# Altium PCB vt18_cpu_board.PcbDoc (part 5 of 7)
Units mil, origin at the board's own origin, x right, y up, seen from the top; angles counter-clockwise.
Board outline 2283.46 x 2244.09 mil, 8 copper layers (Top Layer, GND1, Signal Layer 1, POWER1, POWER2, Signal Layer 2, GND2, Bottom Layer), stack 66.304 mil thick; 339 components, 286 nets, 1965 pads, 1047 vias.
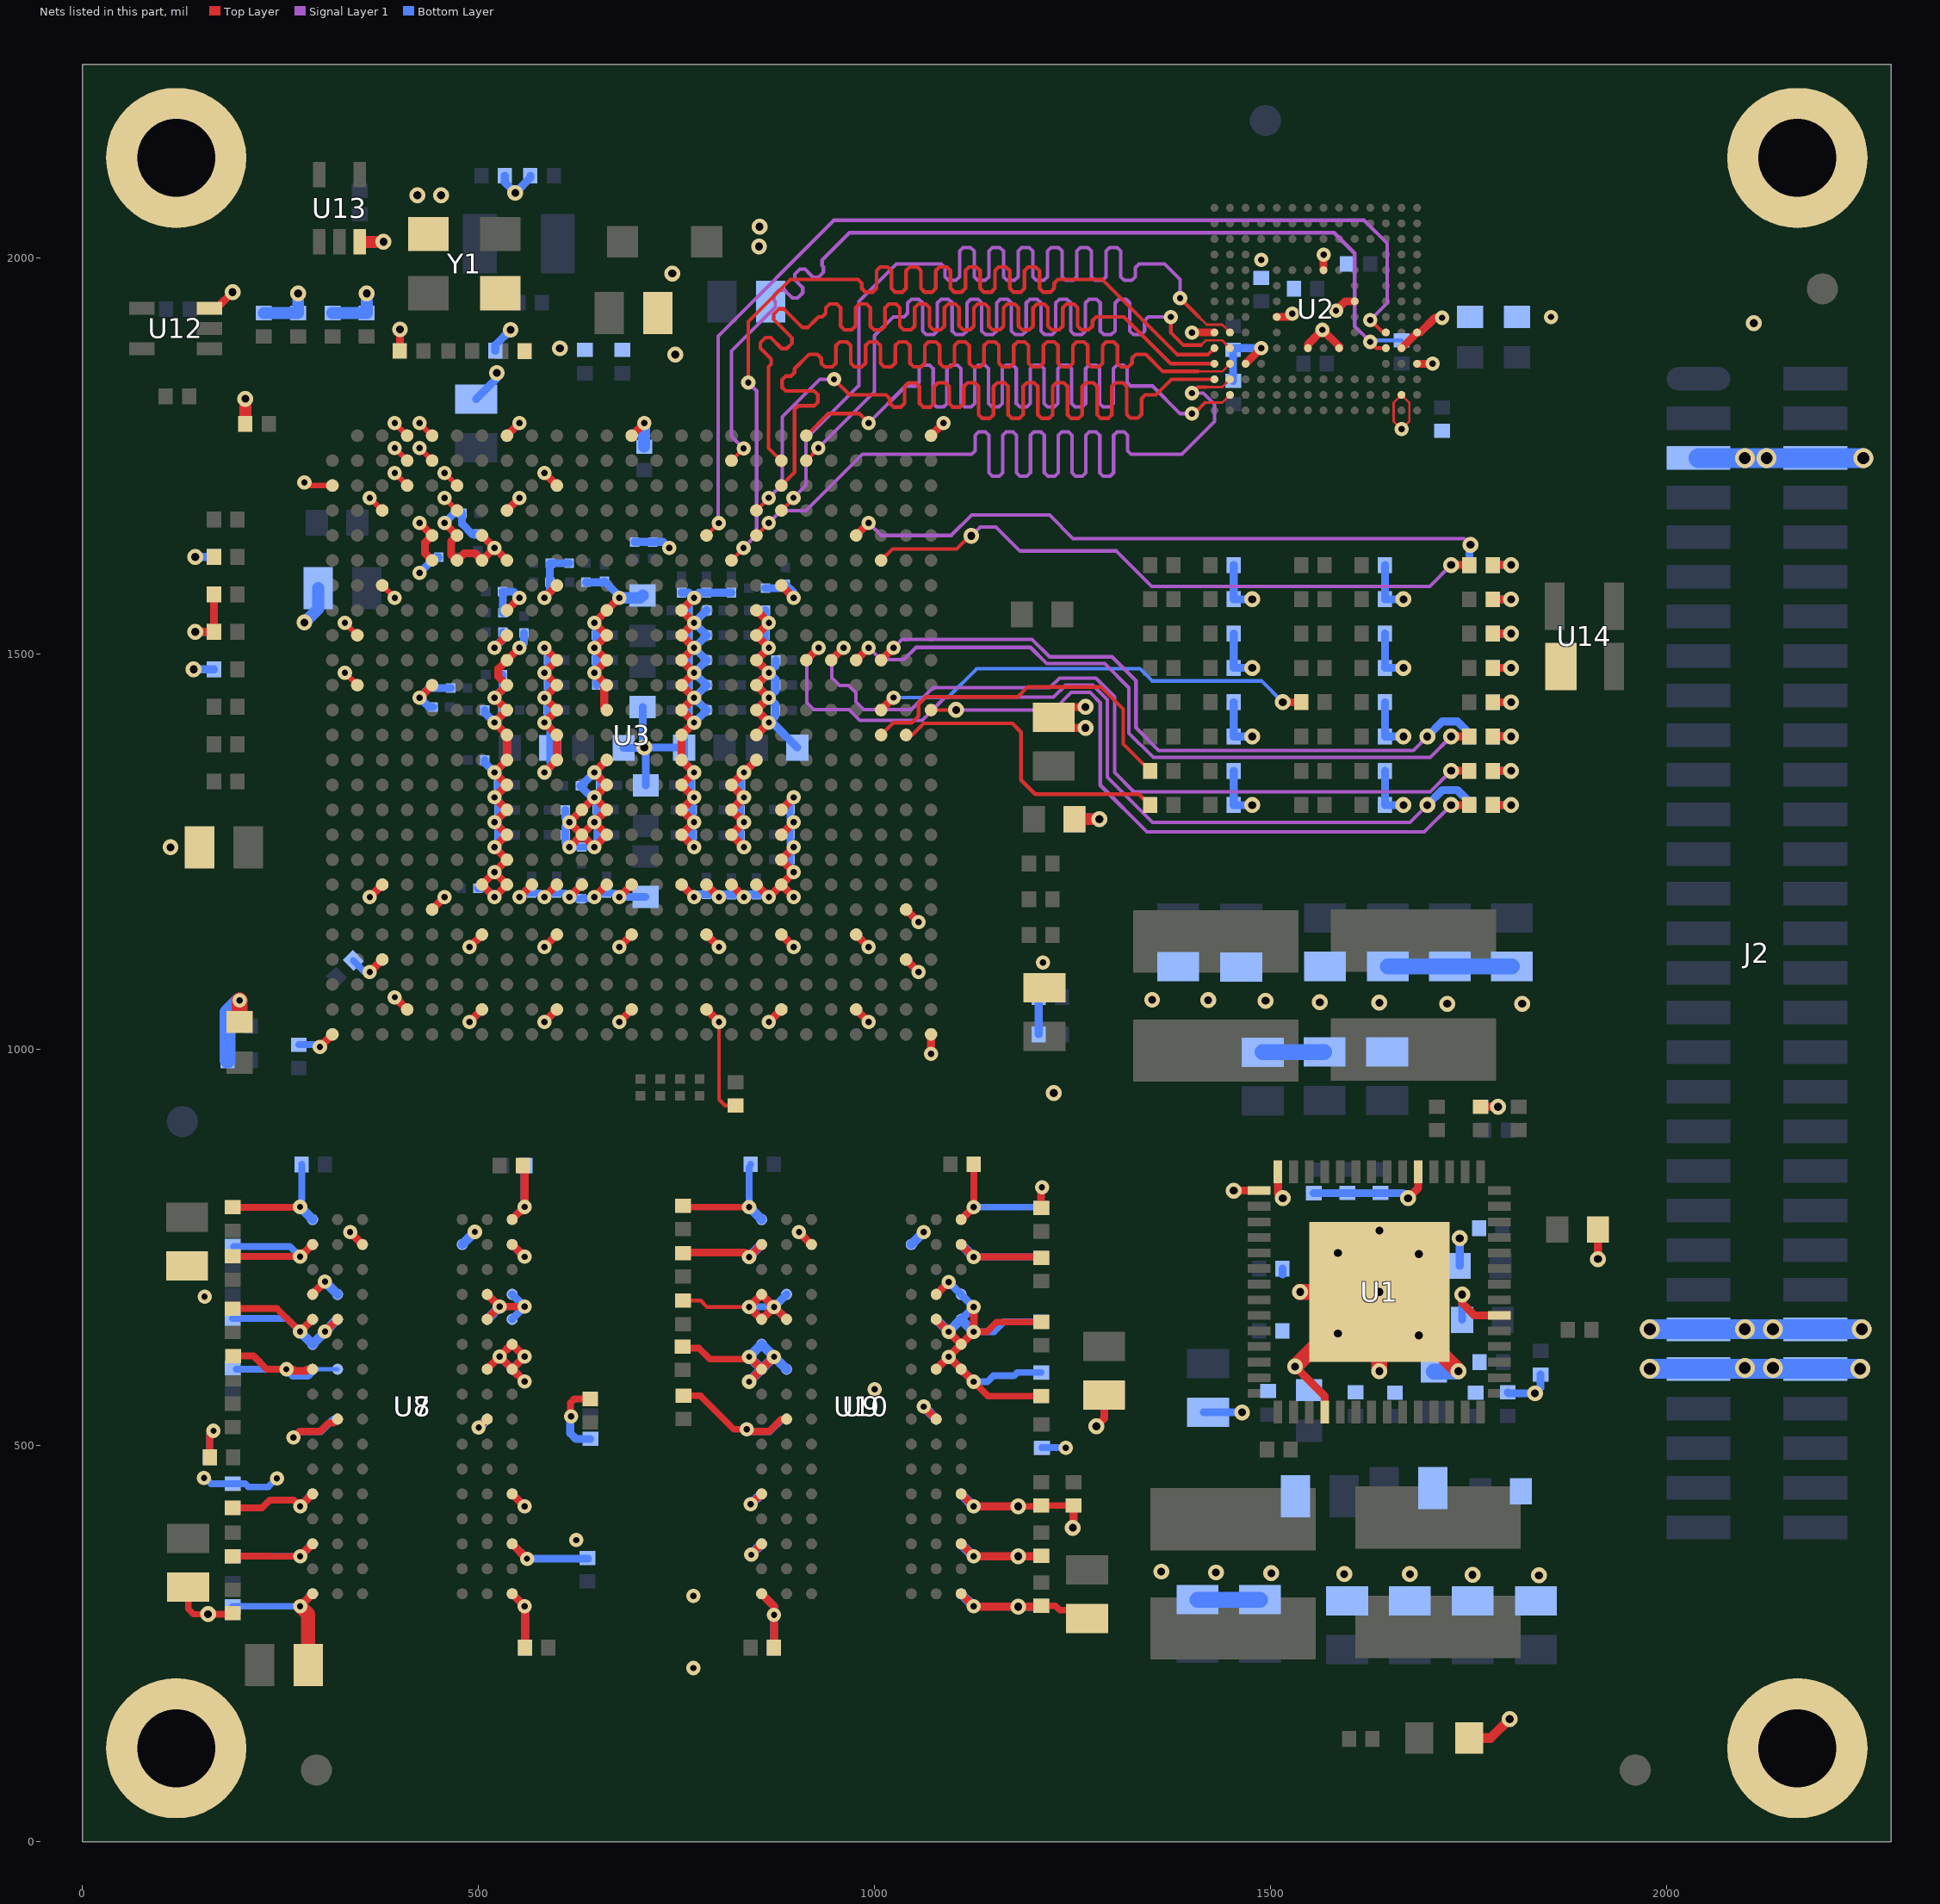
[diagram p11: the nets of this part, all layers, seen from the top]

## Via types
v1: diameter 18, hole 8, Top Layer to Bottom Layer, tented both sides, 718 vias
v2: diameter 20, hole 10, Top Layer to Bottom Layer, tented both sides, 300 vias
v3: diameter 25, hole 15, Top Layer to Bottom Layer, tented both sides, 27 vias
v4: diameter 17.99, hole 7.99, Top Layer to Bottom Layer, tented both sides, 2 vias

## Nets (pads, with @x,y where several pads share a name; then routed paths per layer and width w, separated by ;. In a path a pad name is that pad's centre, name@x,y a point inside that pad or via, vN(x,y) a via of type N, cw(c..) or ccw(c..) an arc to the next point about the centre after c; other vN are vias at no path point) (continued)
EIM-DA13: R97.1 U3.M23 | length 569.7
  Top Layer w10: U3.M23@1008.34,1428.84 v1(1024.08,1444.59) ; v2(1515.51,1438.76) R97.1@1538.86,1438.76
  Bottom Layer w4.7: v1(1024.08,1444.59) 1092.59,1444.59 1129.13,1481.13 1335.12,1481.13 1350.52,1465.73 1488.54,1465.73 v2(1515.51,1438.76)
EIM-DA14: R99.1 U3.N23 | length 443
  Top Layer w4.7: U3.N23@1008.34,1397.34 1023.85,1412.85 1047,1412.85 1055.59,1421.44 1055.59,1436.18 1064.76,1445.35 1180.63,1445.35 1193.41,1458.13 1285.87,1458.13 1314,1430 1314,1386.02 R99.1@1347.87,1352.16
EIM-DA15: R101.1 U3.N24 | length 392.2
  Top Layer w4.7: U3.N24@1039.84,1397.34 1047.49,1397.34 1062.15,1412 1174,1412 1185,1401 1185,1340.6 1202.88,1322.72 1334,1322.72 R101.1@1347.87,1308.85
EIM-EB0: R114.1 U3.K21 | length 1038.2
  Top Layer w10: U3.K21@945.35,1491.83 v1(961.09,1507.58) ; v2(1728,1352.13) R114.1@1751.11,1352.13
  Signal Layer 1 w4.5: v1(961.09,1507.58) 945.84,1492.33 945.84,1469.76 955.76,1459.84 967.41,1459.84 976.34,1450.91 976.34,1439.27 986.27,1429.34 1046.34,1429.34 1074,1457 1221.33,1457 1233.43,1469.1 1279.53,1469.1 1303.1,1445.53 1303.1,1349.9 1327.4,1325.6 1701.47,1325.6 v2(1728,1352.13)
EIM-EB1: R115.1 U3.K23 | length 871.7
  Top Layer w10: U3.K23@1008.34,1491.83 v1(1024.08,1507.58)
  Signal Layer 1 w4.5: v1(1024.08,1507.58) 1034.5,1518 1198.96,1518 1220.96,1496 1300,1496 1330.1,1465.9 1330.1,1406.49 1358.68,1377.91 1680.47,1377.91 v2(1698,1395.43)
  Bottom Layer w10: v2(1698,1395.43) 1716.97,1414.43 1735.87,1414.43 1751.11,1399.19 R115.1@1751.11,1395.43
EIM-EB2: R117.1 U3.E22 | length 840.9
  Top Layer w10: U3.E22@976.84,1649.31 v1(992.59,1665.06)
  Signal Layer 1 w4.5: v1(992.59,1665.06) 1008.34,1649.32 1096.83,1649.32 1122.51,1675 1221,1675 1250.62,1645.38 1744.56,1645.38 v2(1752.44,1637.5)
  Bottom Layer w10: R117.1@1751.11,1611.97 1751.11,1636.18 v2(1752.44,1637.5)
EIM-EB3: R118.1 U3.F23 | length 804.3
  Top Layer w4.7: U3.F23@1008.34,1617.81 1022.69,1632.16 1103.74,1632.16 1120.39,1648.81 v2(1122.19,1648.81) v2@1124,1648.81
  Top Layer w10: v2(1728,1611.97) R118.1@1751.11,1611.97
  Signal Layer 1 w4.5: v2(1122.19,1648.81) 1133.38,1660 1153.27,1660 1183.56,1629.7 1305.3,1629.7 1350.06,1584.94 1700.97,1584.94 v2(1728,1611.97)
EIM-LBA: R113.1 U3.K22 | length 895.7
  Top Layer w10: U3.K22@976.84,1491.83 v1(992.59,1507.58) ; v2(1728,1395.43) R113.1@1751.11,1395.43
  Signal Layer 1 w4.5: v1(992.59,1507.58) 1007.84,1492.33 1036.71,1492.33 1052.38,1508 1196.94,1508 1217.44,1487.5 1290.5,1487.5 1321.1,1456.9 1321.1,1399.74 1351.93,1368.91 1701.47,1368.91 v2(1728,1395.43)
EIM-RW: R116.1 U3.K20 | length 1118.2
  Top Layer w10: U3.K20@913.85,1491.83 v1(929.6,1507.58)
  Signal Layer 1 w4.5: v1(929.6,1507.58) 914.35,1492.33 914.35,1438.27 923.28,1429.34 968,1429.34 981.34,1416 1060,1416 1089.25,1445.25 1226.13,1445.25 1240.98,1460.1 1275.8,1460.1 1294.1,1441.8 1294.1,1343.9 1351,1287 1676.18,1287 v2(1698,1308.82)
  Bottom Layer w10: v2(1698,1308.82) 1716.97,1327.82 1735.87,1327.82 1751.11,1312.58 R116.1@1751.11,1308.82
EIM-WAIT: R112.1 U3.M25 | length 836.8
  Top Layer w4.7: U3.M25@1071.33,1428.84 1102.84,1428.84 v2(1103,1429)
  Top Layer w10: v2(1728,1308.82) R112.1@1751.11,1308.82
  Signal Layer 1 w4.5: v2(1103,1429) 1226.35,1429 1248.35,1451 1272.03,1451 1285,1438.03 1285,1334 1344,1275 1694.18,1275 v2(1728,1308.82)
EMMC-CLK: U2.M6 U3.E16 | length 1307.6
  Top Layer w4.7: U3.E16@787.87,1649.31 803.15,1664.59 v1(803.15,1664.83) ; v1(1625.98,1921.26) 1641.73,1905.51 U2.M6@1645.67,1905.51
  Signal Layer 1 w4.5: v1(803.15,1664.83) 802.38,1665.6 802.38,1900.8 948.82,2047.24 1618.11,2047.24 1647.21,2018.15 1647.21,1942.48 v1(1625.98,1921.26)
EMMC-CMD: R9.1 U2.M5 U3.B17 | length 1260.5
  Top Layer w4.7: U3.B17@819.36,1743.8 v1(834.65,1759.09) ; v1(1625.98,1893.7) 1633.86,1885.83 U2.M5@1645.67,1885.83
  Signal Layer 1 w4.5: v1(834.65,1759.09) 819.38,1774.36 819.38,1882.37 862.2,1925.2 874.87,1937.86 874.87,1944.4 873.11,1946.16 873.11,1952.7 879.65,1959.24 886.2,1959.24 891.22,1954.21 896.25,1949.19 902.79,1949.19 909.33,1955.73 909.33,1962.27 904.3,1967.3 899.28,1972.32 899.28,1978.86 905.82,1985.4 912.36,1985.4 917.39,1980.38 922.41,1975.35 928.95,1975.35 935.49,1981.89 935.49,1988.43 933.74,1990.19 933.74,1996.73 937.01,2000 968.5,2031.5 1580.2,2031.5 1606.3,2005.39 1606.3,1913.39 v1(1625.98,1893.7)
  Bottom Layer w4.7: v1(1625.98,1893.7) 1627.95,1895.66 R9.1@1665.35,1895.66
EMMC-DATA0: U2.A3 U3.D18 | length 1307.6
  Top Layer w4.7: U3.D18@850.86,1680.8 866.38,1696.32 v1(866.38,1696.85) ; v1(948.82,1846.46) 968.5,1826.77 996.06,1826.77 1014.53,1826.77 1019.21,1822.1 1019.21,1816.16 1023.88,1811.49 1033.23,1811.49 1037.91,1816.16 1037.91,1826.77 1037.91,1837.38 1042.58,1842.06 1051.93,1842.06 1056.61,1837.38 1056.61,1826.77 1056.61,1816.16 1061.28,1811.49 1070.63,1811.49 1075.31,1816.16 1075.31,1826.77 1075.31,1837.38 1079.98,1842.06 1089.33,1842.06 1094.01,1837.38 1094.01,1826.77 1094.01,1816.16 1098.68,1811.49 1108.03,1811.49 1112.71,1816.16 1112.71,1826.77 1112.71,1837.38 1117.38,1842.06 1126.73,1842.06 1131.41,1837.38 1131.41,1826.77 1131.41,1801.71 1136.08,1797.04 1145.43,1797.04 1150.11,1801.71 1150.11,1826.77 1150.11,1837.38 1154.78,1842.06 1164.13,1842.06 1168.81,1837.38 1168.81,1826.77 1168.81,1801.71 1173.48,1797.04 1182.83,1797.04 1187.51,1801.71 1187.51,1826.77 1187.51,1837.38 1192.18,1842.06 1201.53,1842.06 1206.21,1837.38 1206.21,1826.77 1206.21,1801.71 1210.88,1797.04 1220.23,1797.04 1224.91,1801.71 1224.91,1826.77 1224.91,1837.38 1229.58,1842.06 1238.93,1842.06 1243.61,1837.38 1243.61,1826.77 1243.61,1801.71 1248.28,1797.04 1257.63,1797.04 1262.31,1801.71 1262.31,1826.77 1262.31,1837.38 1266.98,1842.06 1276.33,1842.06 1281.01,1837.38 1281.01,1826.77 1281.01,1801.71 1285.68,1797.04 1295.03,1797.04 1299.71,1801.71 1299.71,1826.77 1299.71,1837.38 1304.38,1842.06 1313.73,1842.06 1318.41,1837.38 1318.41,1826.77 1318.41,1802.1 1323.08,1797.42 1332.43,1797.42 1337.11,1802.1 1337.11,1822.1 1341.78,1826.77 1346.46,1826.77 1355.33,1826.77 1375.02,1846.46 U2.A3@1429.13,1846.46
  Signal Layer 1 w4.5: v1@866.14,1697.09 v1(866.38,1696.85) 883.39,1713.86 883.39,1799.21 930.63,1846.46 v1(948.82,1846.46)
EMMC-DATA1: U2.A4 U3.B19 | length 1341.3
  Top Layer w4.7: U3.B19@882.36,1743.8 881.89,1743.8 866.14,1759.55 866.14,1862.2 869.45,1865.51 869.45,1872.12 855.71,1885.86 855.71,1892.47 862.32,1899.08 868.93,1899.08 882.67,1885.34 889.28,1885.34 895.89,1891.96 895.89,1898.57 872.54,1921.92 872.54,1928.53 879.15,1935.14 885.77,1935.14 909.12,1911.79 915.73,1911.79 925.64,1921.71 929.13,1925.2 933.81,1925.2 938.48,1929.87 938.48,1936.8 943.16,1941.48 952.51,1941.48 957.18,1936.8 957.18,1925.2 957.18,1913.59 961.86,1908.92 971.21,1908.92 975.88,1913.59 975.88,1925.2 975.88,1936.8 980.56,1941.48 989.91,1941.48 994.58,1936.8 994.58,1925.2 994.58,1913.59 999.26,1908.92 1008.61,1908.92 1013.28,1913.59 1013.28,1925.2 1013.28,1936.8 1017.96,1941.48 1027.31,1941.48 1031.98,1936.8 1031.98,1925.2 1031.98,1913.59 1036.66,1908.92 1046.01,1908.92 1050.68,1913.59 1050.68,1925.2 1050.68,1936.8 1055.36,1941.48 1064.71,1941.48 1069.38,1936.8 1069.38,1925.2 1069.38,1913.59 1074.06,1908.92 1083.41,1908.92 1088.08,1913.59 1088.08,1925.2 1088.08,1936.8 1092.76,1941.48 1102.11,1941.48 1106.78,1936.8 1106.78,1925.2 1106.78,1913.59 1111.46,1908.92 1120.81,1908.92 1125.48,1913.59 1125.48,1925.2 1125.48,1936.8 1130.16,1941.48 1139.51,1941.48 1144.18,1936.8 1144.18,1925.2 1144.18,1913.59 1148.86,1908.92 1158.21,1908.92 1162.88,1913.59 1162.88,1925.2 1162.88,1936.8 1167.56,1941.48 1176.91,1941.48 1181.58,1936.8 1181.58,1925.2 1181.58,1913.59 1186.26,1908.92 1195.61,1908.92 1200.28,1913.59 1200.28,1925.2 1200.28,1936.8 1204.96,1941.48 1214.31,1941.48 1218.98,1936.8 1218.98,1925.2 1218.98,1913.59 1223.66,1908.92 1233.01,1908.92 1237.68,1913.59 1237.68,1925.2 1237.68,1936.8 1242.36,1941.48 1251.71,1941.48 1256.38,1936.8 1256.38,1925.2 1256.38,1913.59 1261.06,1908.92 1270.41,1908.92 1275.08,1913.59 1275.08,1920.52 1279.76,1925.2 1303.15,1925.2 1314.96,1925.2 1374.02,1866.14 U2.A4@1429.13,1866.14
EMMC-DATA2: U2.A5 U3.F17 | length 1307.6
  Top Layer w4.7: U3.F17@819.36,1617.81 834.61,1633.06 v1(834.61,1633.56) ; v1(840.57,1842.52) 840.57,1919.31 893.7,1972.44 956.69,1972.44 979.1,1972.44 983.77,1967.77 983.77,1961.28 988.45,1956.6 997.8,1956.6 1002.47,1961.28 1002.47,1972.44 1002.47,1983.61 1007.15,1988.28 1016.5,1988.28 1021.17,1983.61 1021.17,1972.44 1021.17,1961.28 1025.85,1956.6 1035.2,1956.6 1039.87,1961.28 1039.87,1972.44 1039.87,1983.61 1044.55,1988.28 1053.9,1988.28 1058.57,1983.61 1058.57,1972.44 1058.57,1961.28 1063.25,1956.6 1072.6,1956.6 1077.27,1961.28 1077.27,1972.44 1077.27,1983.61 1081.95,1988.28 1091.3,1988.28 1095.97,1983.61 1095.97,1972.44 1095.97,1961.28 1100.65,1956.6 1110,1956.6 1114.67,1961.28 1114.67,1972.44 1114.67,1983.61 1119.35,1988.28 1128.7,1988.28 1133.37,1983.61 1133.37,1972.44 1133.37,1961.28 1138.05,1956.6 1147.4,1956.6 1152.07,1961.28 1152.07,1972.44 1152.07,1983.61 1156.75,1988.28 1166.1,1988.28 1170.77,1983.61 1170.77,1972.44 1170.77,1961.28 1175.45,1956.6 1184.8,1956.6 1189.47,1961.28 1189.47,1972.44 1189.47,1983.61 1194.15,1988.28 1203.5,1988.28 1208.17,1983.61 1208.17,1972.44 1208.17,1961.28 1212.85,1956.6 1222.2,1956.6 1226.87,1961.28 1226.87,1967.77 1231.55,1972.44 1236.22,1972.44 1287.4,1972.44 1382.02,1877.83 1421.13,1877.83 U2.A5@1429.13,1885.83
  Signal Layer 1 w4.5: v1(834.61,1633.56) 850.65,1649.61 851.15,1649.61 851.15,1831.93 v1(840.57,1842.52)
EMMC-DATA3: U2.B2 U3.A20 | length 1307.6
  Top Layer w3: 1417.32,1816.97 1439.02,1816.97 U2.B2@1448.82,1826.77
  Top Layer w4.7: U3.A20@913.85,1775.29 941.71,1803.15 980.78,1803.15 v1(992.59,1791.34) ; v1(1400.69,1803.15) 1403.5,1803.15 1417.32,1816.97
  Signal Layer 1 w4.5: v1(992.59,1791.34) 1039.27,1838.02 1047.75,1838.02 1052.12,1838.02 1056.5,1842.39 1056.5,1860.13 1060.87,1864.5 1069.62,1864.5 1074,1860.13 1074,1838.02 1074,1815.91 1078.37,1811.53 1087.12,1811.53 1091.5,1815.91 1091.5,1838.02 1091.5,1860.13 1095.87,1864.5 1104.62,1864.5 1109,1860.13 1109,1838.02 1109,1815.91 1113.37,1811.53 1122.12,1811.53 1126.5,1815.91 1126.5,1838.02 1126.5,1860.13 1130.87,1864.5 1139.62,1864.5 1144,1860.13 1144,1838.02 1144,1815.91 1148.37,1811.53 1157.12,1811.53 1161.5,1815.91 1161.5,1838.02 1161.5,1860.13 1165.87,1864.5 1174.62,1864.5 1179,1860.13 1179,1838.02 1179,1815.91 1183.37,1811.53 1192.12,1811.53 1196.5,1815.91 1196.5,1838.02 1196.5,1860.13 1200.87,1864.5 1209.62,1864.5 1214,1860.13 1214,1838.02 1214,1815.91 1218.37,1811.53 1227.12,1811.53 1231.5,1815.91 1231.5,1838.02 1231.5,1860.13 1235.87,1864.5 1244.62,1864.5 1249,1860.13 1249,1838.02 1249,1815.91 1253.37,1811.53 1262.12,1811.53 1266.5,1815.91 1266.5,1838.02 1266.5,1860.13 1270.87,1864.5 1279.62,1864.5 1284,1860.13 1284,1838.02 1284,1815.91 1288.37,1811.53 1297.12,1811.53 1301.5,1815.91 1301.5,1838.02 1301.5,1860.13 1305.87,1864.5 1314.62,1864.5 1319,1860.13 1319,1842.39 1323.37,1838.02 1334.65,1838.02 1350.96,1838.02 1385.83,1803.15 v1(1400.69,1803.15)
EMMC-DATA4: U2.B3 U3.E18 | length 1307.6
  Top Layer w3: 1419.33,1836.61 1438.98,1836.61 U2.B3@1448.82,1846.46
  Top Layer w4.7: U3.E18@854.04,1649.31 U3.E18@850.86,1649.31 866.38,1664.83 v1(866.38,1665.04) ; v1(1400.69,1829.03) 1408.27,1836.61 1419.33,1836.61
  Signal Layer 1 w4.5: v1@866.38,1665.3 v1(866.38,1665.04) 882.06,1680.72 913.39,1680.72 984.63,1751.97 1118.11,1751.97 1122.49,1751.97 1126.86,1756.34 1126.86,1775.61 1131.24,1779.98 1139.99,1779.98 1144.36,1775.61 1144.36,1751.97 1144.36,1728.33 1148.74,1723.96 1157.49,1723.96 1161.86,1728.33 1161.86,1751.97 1161.86,1775.61 1166.24,1779.98 1174.99,1779.98 1179.36,1775.61 1179.36,1751.97 1179.36,1728.33 1183.74,1723.96 1192.49,1723.96 1196.86,1728.33 1196.86,1751.97 1196.86,1775.61 1201.24,1779.98 1209.99,1779.98 1214.36,1775.61 1214.36,1751.97 1214.36,1728.33 1218.74,1723.96 1227.49,1723.96 1231.86,1728.33 1231.86,1751.97 1231.86,1775.61 1236.24,1779.98 1244.99,1779.98 1249.36,1775.61 1249.36,1751.97 1249.36,1728.33 1253.74,1723.96 1262.49,1723.96 1266.86,1728.33 1266.86,1751.97 1266.86,1775.61 1271.24,1779.98 1279.99,1779.98 1284.36,1775.61 1284.36,1751.97 1284.36,1728.33 1288.74,1723.96 1297.49,1723.96 1301.86,1728.33 1301.86,1751.97 1301.86,1775.61 1306.24,1779.98 1314.99,1779.98 1319.36,1775.61 1319.36,1756.34 1323.74,1751.97 1366.14,1751.97 1387.9,1751.97 1429.13,1793.2 1429.13,1814.96 1415.06,1829.03 v1(1400.69,1829.03)
EMMC-DATA5: U2.B4 U3.C19 | length 1343.2
  Top Layer w3: 1408.27,1856.34 1439.02,1856.34 U2.B4@1448.82,1866.14
  Top Layer w4.7: U3.C19@882.36,1712.3 899.11,1729.05 899.11,1803.15 899.11,1808.31 903.78,1812.99 923.81,1812.99 928.48,1817.66 928.48,1827.01 923.81,1831.69 899.11,1831.69 887.95,1831.69 883.27,1836.36 883.27,1845.71 887.95,1850.39 894.43,1850.39 899.11,1855.06 899.11,1859.74 917.32,1877.95 927.92,1877.95 932.6,1873.28 932.6,1866.79 937.27,1862.12 946.62,1862.12 951.3,1866.79 951.3,1877.95 951.3,1889.11 955.97,1893.79 965.32,1893.79 970,1889.11 970,1877.95 970,1866.79 974.67,1862.12 984.02,1862.12 988.7,1866.79 988.7,1877.95 988.7,1889.11 993.37,1893.79 1002.72,1893.79 1007.4,1889.11 1007.4,1877.95 1007.4,1866.79 1012.07,1862.12 1021.42,1862.12 1026.1,1866.79 1026.1,1877.95 1026.1,1889.11 1030.77,1893.79 1040.12,1893.79 1044.8,1889.11 1044.8,1877.95 1044.8,1866.79 1049.47,1862.12 1058.82,1862.12 1063.5,1866.79 1063.5,1877.95 1063.5,1889.11 1068.17,1893.79 1077.52,1893.79 1082.2,1889.11 1082.2,1877.95 1082.2,1866.79 1086.87,1862.12 1096.22,1862.12 1100.9,1866.79 1100.9,1877.95 1100.9,1889.11 1105.57,1893.79 1114.92,1893.79 1119.6,1889.11 1119.6,1877.95 1119.6,1866.79 1124.27,1862.12 1133.62,1862.12 1138.3,1866.79 1138.3,1877.95 1138.3,1889.11 1142.97,1893.79 1152.32,1893.79 1157,1889.11 1157,1877.95 1157,1866.79 1161.67,1862.12 1171.02,1862.12 1175.7,1866.79 1175.7,1877.95 1175.7,1889.11 1180.37,1893.79 1189.72,1893.79 1194.4,1889.11 1194.4,1877.95 1194.4,1866.79 1199.07,1862.12 1208.42,1862.12 1213.1,1866.79 1213.1,1877.95 1213.1,1889.11 1217.77,1893.79 1227.12,1893.79 1231.8,1889.11 1231.8,1877.95 1231.8,1866.79 1236.47,1862.12 1245.82,1862.12 1250.5,1866.79 1250.5,1877.95 1250.5,1889.11 1255.17,1893.79 1264.52,1893.79 1269.2,1889.11 1269.2,1877.95 1269.2,1866.79 1273.87,1862.12 1283.22,1862.12 1287.9,1866.79 1287.9,1877.95 1287.9,1889.11 1292.57,1893.79 1301.92,1893.79 1306.6,1889.11 1306.6,1877.95 1306.6,1866.79 1311.27,1862.12 1320.62,1862.12 1325.3,1866.79 1325.3,1873.28 1329.97,1877.95 1334.65,1877.95 1342.52,1877.95 1364.13,1856.34 1408.27,1856.34
EMMC-DATA6: U2.B5 U3.B20 | length 1307.6
  Top Layer w3: 1412.49,1889.76 1418.35,1895.63 1439.02,1895.63 U2.B5@1448.82,1885.83
  Top Layer w4.7: U3.B20@913.85,1743.8 929.13,1759.09 v1(929.13,1759.84) ; v1(1374.02,1925.2) 1374.02,1905.51 1389.76,1889.76 1412.49,1889.76
  Signal Layer 1 w4.5: v1(929.13,1759.84) 944.88,1775.59 1000,1830.71 1000,1897.64 1000,1901.57 1023.62,1925.2 1037.17,1925.2 1041.84,1929.87 1041.84,1942.89 1046.52,1947.57 1055.87,1947.57 1060.54,1942.89 1060.54,1925.2 1060.54,1907.5 1065.22,1902.82 1074.57,1902.82 1079.24,1907.5 1079.24,1925.2 1079.24,1942.89 1083.92,1947.57 1093.27,1947.57 1097.94,1942.89 1097.94,1925.2 1097.94,1907.5 1102.62,1902.82 1111.97,1902.82 1116.64,1907.5 1116.64,1925.2 1116.64,1942.89 1121.32,1947.57 1130.67,1947.57 1135.34,1942.89 1135.34,1925.2 1135.34,1907.5 1140.02,1902.82 1149.37,1902.82 1154.04,1907.5 1154.04,1925.2 1154.04,1942.89 1158.72,1947.57 1168.07,1947.57 1172.74,1942.89 1172.74,1925.2 1172.74,1907.5 1177.42,1902.82 1186.77,1902.82 1191.44,1907.5 1191.44,1925.2 1191.44,1942.89 1196.12,1947.57 1205.47,1947.57 1210.14,1942.89 1210.14,1925.2 1210.14,1907.5 1214.82,1902.82 1224.17,1902.82 1228.84,1907.5 1228.84,1925.2 1228.84,1942.89 1233.52,1947.57 1242.87,1947.57 1247.54,1942.89 1247.54,1925.2 1247.54,1907.5 1252.22,1902.82 1261.57,1902.82 1266.24,1907.5 1266.24,1925.2 1266.24,1942.89 1270.92,1947.57 1280.27,1947.57 1284.94,1942.89 1284.94,1925.2 1284.94,1907.5 1289.62,1902.82 1298.97,1902.82 1303.64,1907.5 1303.64,1925.2 1303.64,1942.89 1308.32,1947.57 1317.67,1947.57 1322.34,1942.89 1322.34,1925.2 1322.34,1907.5 1327.02,1902.82 1336.37,1902.82 1341.04,1907.5 1341.04,1920.52 1345.72,1925.2 1350.39,1925.2 v1(1374.02,1925.2)
EMMC-DATA7: U2.B6 U3.D19 | length 1307.6
  Top Layer w3: 1409.45,1925.2 1419.33,1915.31 1439.02,1915.31 U2.B6@1448.82,1905.51
  Top Layer w4.7: U3.D19@882.36,1680.8 882.53,1680.8 898.11,1696.38 v1(897.64,1696.85) ; v1(1385.83,1948.82) 1401.57,1933.07 1409.45,1925.2
  Signal Layer 1 w4.5: v1(897.64,1696.85) 913.39,1712.6 913.39,1771.65 980.32,1838.58 980.32,1944.88 1027.56,1992.13 1058.57,1992.13 1084.21,1992.13 1088.83,1987.5 1088.83,1975.96 1093.46,1971.34 1102.71,1971.34 1107.33,1975.96 1107.33,1992.13 1107.33,2008.29 1111.96,2012.91 1121.21,2012.91 1125.83,2008.29 1125.83,1992.13 1125.83,1975.96 1130.46,1971.34 1139.71,1971.34 1144.33,1975.96 1144.33,1992.13 1144.33,2008.29 1148.96,2012.91 1158.21,2012.91 1162.83,2008.29 1162.83,1992.13 1162.83,1975.96 1167.46,1971.34 1176.71,1971.34 1181.33,1975.96 1181.33,1992.13 1181.33,2008.29 1185.96,2012.91 1195.21,2012.91 1199.83,2008.29 1199.83,1992.13 1199.83,1975.96 1204.46,1971.34 1213.71,1971.34 1218.33,1975.96 1218.33,1992.13 1218.33,2008.29 1222.96,2012.91 1232.21,2012.91 1236.83,2008.29 1236.83,1992.13 1236.83,1975.96 1241.46,1971.34 1250.71,1971.34 1255.33,1975.96 1255.33,1992.13 1255.33,2008.29 1259.96,2012.91 1269.21,2012.91 1273.83,2008.29 1273.83,1992.13 1273.83,1975.96 1278.46,1971.34 1287.71,1971.34 1292.33,1975.96 1292.33,1992.13 1292.33,2008.29 1296.96,2012.91 1306.21,2012.91 1310.83,2008.29 1310.83,1992.13 1310.83,1975.96 1315.46,1971.34 1324.71,1971.34 1329.33,1975.96 1329.33,1987.5 1333.96,1992.13 1338.58,1992.13 1366.14,1992.13 1385.83,1972.44 v1(1385.83,1948.82)
GND: C1.2 C2.2 C3.2 C4.2 C5.2 C6.2 C7.2 C9.2 C10.2 C11.2 C12.2 C13.2 C14.2 C15.2 C16.2 C17.2 C18.2 C19.2 C20.2 C21.2 C22.2 C23.2 C24.2 C25.2 C26.2 C27.2 C28.2 C29.2 C30.2 C31.2 C32.2 C33.2 C34.2 C35.2 C36.2 C37.1 C38.2 C39.2 C40.2 C41.2 C42.2 C43.2 C44.2 C45.2 C46.2 C47.2 C48.2 C49.2 C50.2 C51.2 C52.2 C53.2 C54.2 C55.2 C56.2 C57.2 C58.2 C59.2 C60.2 C61.2 C62.2 C63.2 C64.2 C65.2 C66.2 C67.2 C68.2 C69.2 C70.2 C71.2 C72.2 C73.2 C74.2 C75.2 C76.2 C77.2 C78.2 C79.2 C80.2 C81.2 C82.2 C83.2 C84.2 C85.2 C86.2 C87.2 C88.2 C89.2 C90.2 C91.2 C92.2 C93.2 C94.1 C95.2 C96.2 C97.2 C98.2 C99.2 C100.2 C101.2 C102.2 C103.2 C104.2 C105.2 C106.2 C107.2 C108.2 C109.2 C110.2 C111.2 C112.1 C113.2 C114.2 C115.2 C116.2 C117.2 C118.2 C119.2 C120.2 C121.2 C122.2 C123.2 C124.2 C125.2 C126.2 C127.2 C128.2 C129.2 C130.2 C131.2 C132.2 C133.2 C134.2 C135.2 C136.2 C137.2 C138.2 C139.2 C140.2 C141.2 C142.2 C143.2 C144.2 C145.2 C146.2 C147.2 C148.2 C149.2 C150.2 C151.2 C152.2 C153.2 C154.2 C155.2 C156.2 C157.2 C158.2 C159.2 C160.2 C161.2 C162.2 C163.2 C164.2 C165.2 C166.2 C167.2 C168.2 C169.2 C170.2 C171.2 C172.2 C173.2 C174.2 C175.2 C176.2 C177.2 C178.2 C179.2 C180.2 C181.2 C182.2 C183.2 C184.2 C185.2 C186.2 C187.2 C188.2 C189.2 C190.2 C191.2 C192.2 C193.2 C194.2 C195.2 C196.2 C197.2 C198.2 D1.2 J2.5 J2.6 J2.49 J2.50 J2.51 J2.52 pad.EndPad pad.MT1 pad.MT2 pad.MT3 pad.MT4 R4.1 R6.1 R19.2 R20.2 R24.2 R25.1 R29.2 R30.1 R31.2 R32.2 R35.1 R36.1 R37.2 R38.2 R39.1 R40.2 R41.1 R64.1 R65.1 R66.1 R67.1 R68.2 R70.2 R72.2 R74.2 R76.2 R78.2 R80.2 R83.2 R85.2 R87.2 R89.2 R91.2 R93.2 R96.2 R98.2 R100.2 R102.2 R103.2 R104.2 R105.2 R107.2 R108.2 R109.2 R110.2 R111.2 R112.2 R113.2 R114.2 R115.2 R116.2 R117.2 R118.2 U1.5 U1.14 U1.15 U1.32 U1.48 U1.57 U2.A6 U2.C4 U2.E7 U2.G5 U2.H10 U2.J5 U2.K8 U2.N2 U2.N5 U2.P4 U2.P6 U3.A4 U3.A5 U3.A8 U3.A13 U3.A25 U3.AA7 U3.AA10 U3.AA13 U3.AA16 U3.AA19 U3.AA22 U3.AB3 U3.AB24 U3.AD4 U3.AD7 U3.AD10 U3.AD13 U3.AD16 U3.AD19 U3.AD22 U3.AE1 U3.AE25 U3.B4 U3.B5 U3.C1 U3.C4 U3.C6 U3.C10 U3.D3 U3.D6 U3.D8 U3.E5 U3.E6 U3.E7 U3.F5 U3.F6 U3.F7 U3.F8 U3.G3 U3.G10 U3.G19 U3.H8 U3.H12 U3.H15 U3.H18 U3.J2 U3.J8 U3.J12 U3.J15 U3.J18 U3.K8 U3.K10 U3.K12 U3.K15 U3.K18 U3.L2 U3.L5 U3.L8 U3.L10 U3.L12 U3.L15 U3.L18 U3.M8 U3.M10 U3.M12 U3.M15 U3.M18 U3.N8 U3.N10 U3.N15 U3.N18 U3.P8 U3.P10 U3.P12 U3.P15 U3.P18 U3.R8 U3.R12 U3.R15 U3.R17 U3.T8 U3.T11 U3.T12 U3.T15 U3.T17 U3.T19 U3.U8 U3.U11 U3.U12 U3.U15 U3.U17 U3.U19 U3.V8 U3.V19 U3.W3 U3.W7 U3.W8 U3.W9 U3.W10 U3.W11 U3.W12 U3.W13 U3.W15 U3.W16 U3.W17 U3.W18 U3.W19 U3.Y5 U3.Y24 U7.A9 U7.B1 U7.B3 U7.B9 U7.D1 U7.D8 U7.E1 U7.E2 U7.E8 U7.F9 U7.G1 U7.G8 U7.G9 U7.J2 U7.J8 U7.M1 U7.M9 U7.P1 U7.P9 U7.T1 U7.T9 U8.A9 U8.B1 U8.B3 U8.B9 U8.D1 U8.D8 U8.E1 U8.E2 U8.E8 U8.F9 U8.G1 U8.G8 U8.G9 U8.J2 U8.J8 U8.M1 U8.M9 U8.P1 U8.P9 U8.T1 U8.T9 U9.A9 U9.B1 U9.B3 U9.B9 U9.D1 U9.D8 U9.E1 U9.E2 U9.E8 U9.F9 U9.G1 U9.G8 U9.G9 U9.J2 U9.J8 U9.M1 U9.M9 U9.P1 U9.P9 U9.T1 U9.T9 U10.A9 U10.B1 U10.B3 U10.B9 U10.D1 U10.D8 U10.E1 U10.E2 U10.E8 U10.F9 U10.G1 U10.G8 U10.G9 U10.J2 U10.J8 U10.M1 U10.M9 U10.P1 U10.P9 U10.T1 U10.T9 U12.3 U13.3 U14.1 Y1.2 Y1.4 | length 17286
  Top Layer w3: 1655.55,1793.26 1655.55,1816.97 U2.N2@1665.35,1826.77 1675.24,1816.89 1675.24,1793.35 v1(1665.35,1783.46) 1655.55,1793.26
  Top Layer w4.7: v1(803.62,1035.14) 803.62,937.1 811.14,929.58 R40.2@824.38,929.58
  Top Layer w5: C169.2@758.38,683.1 780.62,683.1 788.4,675.32 v1(841.65,675.32)
  Top Layer w7: v1(280.07,1716.16) 283.93,1712.3 U3.C1@315.43,1712.3 ; v1(331.17,1476.08) U3.L2@346.92,1460.33 ; v1(331.17,1539.07) U3.J2@346.92,1523.32 ; v1(362.67,1696.55) U3.D3@378.42,1680.8 ; U3.G3@378.42,1586.32 v1(394.17,1570.57) ; v1(394.17,1728.05) U3.C4@409.92,1712.3 ; v1(394.17,1759.55) U3.B4@409.92,1743.8 ; v1(394.17,1791.04) U3.A4@409.92,1775.29 ; v1(425.66,1759.55) U3.B5@441.41,1743.8 ; v1(425.66,1791.04) U3.A5@441.41,1775.29 ; v1(457.16,1696.55) U3.D6@472.91,1680.8 ; v1(457.16,1728.05) U3.C6@472.91,1712.3
  Top Layer w8: C184.2@133.38,321.63 133.38,294.13 140.17,287.34 v2(158.38,287.34) ; C136.2@1210.38,297.83 1228.38,297.83 1233.87,292.34 1257.67,292.34 C182.2@1268.38,281.63
  Top Layer w8.5: v2(158.38,287.34) 188.21,287.34 C149.2@189.45,288.58 ; C150.2@160.62,485.34 160.62,514.17 v1(165.33,518.89) ; C148.2@189.45,360.58 236.19,360.58 236.4,360.36 v1(274.72,360.36) ; C146.2@189.45,421.58 226.62,421.58 236.38,431.34 266.74,431.34 v1(274.72,423.36) ; C170.2@189.45,801.1 274.18,801.1 v1(274.64,801.56) ; C147.2@189.7,673.1 245.62,673.1 v1(274.64,644.08) ; C151.2@189.7,739.1 274.1,739.1 v1(274.64,738.57) ; C132.2@190.19,613.36 215.9,613.36 232.68,596.58 v1(257.28,596.58) ; v1@615.88,537.24 615.88,554.1 620.88,559.1 R35.1@641.1,559.1 ; C131.2@758.38,623.1 778.37,623.1 792.13,609.34 838.66,609.34 v1(841.65,612.33) ; C171.2@758.38,803.1 760.17,801.31 v1(841.65,801.31) ; R39.1@758.7,563.1 780.12,563.1 822.38,520.84 v1(838.65,520.84) ; v1(1125.11,580.84) 1143.37,562.58 C135.2@1210.38,562.58 ; v1(1125.11,643.83) 1141.87,643.83 1154.14,656.1 C134.2@1210.38,656.1 ; v1(1125.11,738.32) 1209.16,738.32 C139.2@1210.38,737.1 ; v1(1125.11,801.31) 1125.38,801.58 1125.38,852.1 C153.2@1125.14,855.34 ; v2(1181.38,423.36) 1209.16,423.36 C133.2@1210.38,424.58 R41.1@1251.38,424.58
  Top Layer w9: v1(266.38,510.34) 274.13,518.09 300.13,518.09 310.73,528.69 317.06,528.69 U8.J2@321.95,533.6 ; v1(526.62,675.58) 536.01,675.58 548.86,675.57 v1(558.12,675.58) ; v1(838.65,520.84) 841.55,517.94 866.89,517.94 882.54,533.59 U10.J2@888.88,533.6
  Top Layer w10: v2(142.28,1527.58) R29.2@165.9,1527.58 R25.1@165.9,1574.82 ; U12.3@160,1936.2 169.24,1936.2 v2(189.44,1956.4) ; v1(257.28,596.58) 265.18,596.58 267.18,594.58 282.1,594.58 284.1,596.58 U8.G1@290.46,596.59 ; v1(274.64,644.08) 290.14,659.58 U8.E1@290.46,659.59 ; v1(274.64,738.57) 290.14,754.06 U8.B1@290.46,754.07 ; v1(274.72,297.37) U8.T1@290.46,313.13 ; v1(274.72,360.36) U8.P1@290.46,376.12 ; v1(274.72,423.36) U8.M1@290.46,439.11 ; U8.D1@290.46,691.08 290.47,691.4 v1(306.14,707.07) ; v1(299.68,1003.64) U3.AE1@315.43,1019.39 ; v1(306.14,644.08) 321.63,659.58 U8.E2@321.95,659.59 ; v1(337.78,769.79) U8.B3@353.46,754.11 ; v1(362.67,1098.13) U3.AB3@378.42,1113.88 ; v1(362.67,1192.62) U3.W3@378.42,1208.36 ; v1(394.18,1066.26) 409.55,1050.88 U3.AD4@409.92,1050.88 ; C118.2@400.72,1882.28 v2(400.72,1909.44) ; v1(425.66,1444.58) U3.L5@441.41,1460.33 ; v1(425.66,1665.06) U3.E5@441.41,1649.31 432.43,1640.34 432.43,1626.79 U3.F5@441.41,1617.81 ; U3.Y5@441.41,1176.87 v1(457.16,1192.62) ; v1(457.16,1665.06) U3.E6@472.91,1649.31 465.5,1641.91 465.5,1625.22 U3.F6@472.91,1617.81 481.89,1626.79 495.42,1626.79 U3.F7@504.4,1617.81 v1(520.15,1633.56) ; v1(488.66,1035.14) U3.AD7@504.4,1050.88 ; v1(488.66,1129.62) 504.4,1144.87 U3.AA7@504.4,1145.37 ; v1(500.19,522.84) U8.J8@510.93,533.6 ; U3.E7@504.4,1649.31 v1(520.15,1633.56) ; U8.G8@510.93,596.59 510.94,596.9 v1(526.62,612.58) ; U8.E8@510.93,659.59 510.94,659.89 v1(526.62,675.58) 511.13,691.07 U8.D8@510.93,691.08 ; v1(520.16,1507.57) U3.J8@535.91,1523.32 ; U3.H8@535.9,1554.82 v1(551.65,1570.57) ; U3.F8@535.9,1617.81 v1(520.15,1633.56) ; U3.D8@535.91,1680.8 v1(551.66,1696.55) ; U3.A8@535.9,1775.29 v1(551.65,1791.04) ; U8.T9@542.42,313.13 v1(558.18,297.37) 558.62,296.94 C166.2@558.62,244.94 ; U8.P9@542.42,376.12 v1(561.19,357.35) ; U8.M9@542.42,439.11 v1(558.18,423.36) ; U8.B9@542.42,754.07 542.62,754.06 v1(558.12,738.56) ; U8.A9@542.42,785.57 542.43,785.87 v1(558.12,801.56) 558.12,851.83 C167.2@556.21,853.74 ; v1(551.65,1192.62) U3.W9@567.4,1208.36 ; v1(551.65,1507.58) U3.K8@535.9,1491.83 525.03,1480.96 525.03,1471.2 U3.L8@535.9,1460.33 v1(520.15,1444.58) U3.M8@535.9,1428.84 v1(520.15,1413.09) U3.N8@535.9,1397.34 U3.P8@535.9,1365.84 v1(520.15,1350.1) U3.R8@535.9,1334.35 v1(520.15,1318.6) U3.T8@535.9,1302.85 v1(520.15,1287.1) U3.U8@535.9,1271.36 v1(520.15,1255.61) U3.V8@535.9,1239.86 v1(520.15,1224.11) ; v1(558.12,581.09) 542.63,596.58 U8.G9@542.42,596.59 U8.G9@542.43,596.77 ; v1(583.14,1035.14) U3.AD10@598.89,1050.88 ; v1(583.14,1129.62) U3.AA10@598.89,1145.37 ; v1(583.14,1192.62) U3.W10@598.89,1208.36 ; v1(583.14,1350.1) U3.P10@598.89,1365.84 U3.N10@598.89,1397.34 v1(583.14,1413.09) U3.M10@598.89,1428.84 v1(583.14,1444.58) U3.L10@598.89,1460.33 v1(583.14,1476.08) U3.K10@598.89,1491.83 v1(583.14,1507.58) ; v1(583.13,1570.57) U3.G10@598.89,1586.32 ; v1(583.14,1728.05) U3.C10@598.89,1712.3 ; v1(614.64,1192.62) U3.W11@630.39,1208.36 ; v1(614.64,1255.61) U3.U11@630.39,1271.36 ; v1(646.14,1192.62) U3.W12@661.88,1208.36 ; U3.P12@661.88,1365.84 v1(646.14,1350.1) U3.R12@661.88,1334.35 v1(646.14,1318.6) ; U3.M12@661.88,1428.84 658.63,1432.09 658.63,1457.08 U3.L12@661.88,1460.33 v1(646.14,1476.08) U3.K12@661.88,1491.83 v1(646.14,1507.58) U3.J12@661.88,1523.32 v1(646.14,1539.07) U3.H12@661.88,1554.82 v1(677.63,1570.57) ; v1(677.63,1035.14) U3.AD13@693.38,1050.88 ; v1(677.63,1129.62) U3.AA13@693.38,1145.37 ; v1(677.63,1192.62) U3.W13@693.38,1208.36 ; U3.A13@693.38,1775.29 v1(709.13,1791.04) ; U3.W15@756.37,1208.36 v1(772.12,1192.62) ; U3.P15@756.37,1365.84 U3.N15@756.37,1397.34 v1(772.12,1413.09) U3.M15@756.37,1428.84 ; U3.P15@756.37,1365.84 v1(772.12,1350.1) U3.R15@756.37,1334.35 v1(772.12,1318.6) U3.T15@756.37,1302.85 v1(772.12,1287.1) U3.U15@756.37,1271.36 v1(772.12,1255.61) ; U3.M15@756.37,1428.84 v1(772.12,1444.58) U3.L15@756.37,1460.33 v1(772.12,1476.08) U3.K15@756.37,1491.83 v1(772.12,1507.58) U3.J15@756.37,1523.32 v1(772.12,1539.07) U3.H15@756.37,1554.82 v1(772.12,1570.57) ; C168.2@758.38,744.06 835.91,744.06 v1(841.65,738.32) U10.B1@857.39,754.07 ; U3.AD16@787.87,1050.88 v1(803.62,1035.14) ; U3.AA16@787.87,1145.37 v1(803.62,1129.62) ; U3.W16@787.87,1208.36 v1(803.62,1192.62) ; U3.W17@819.36,1208.36 v1(835.11,1192.62) ; v1(835.11,1255.61) U3.U17@819.36,1271.36 v1(835.11,1287.1) U3.T17@819.36,1302.85 v1(835.11,1318.6) U3.R17@819.36,1334.35 v1(835.11,1350.1) U3.P18@850.86,1365.84 ; v1(841.65,580.84) U10.G1@857.39,596.59 ; v1(841.65,612.33) U10.G1@857.39,596.59 ; v1(843.65,426.31) U10.M1@857.39,439.11 ; v1(844.38,362.34) U10.P1@857.39,376.12 ; U3.W18@850.86,1208.36 v1(866.61,1192.62) U3.W19@882.36,1208.36 ; U3.N18@850.86,1397.34 v1(866.61,1413.09) U3.M18@850.86,1428.84 v1(866.61,1444.58) U3.L18@850.86,1460.33 v1(866.61,1476.08) U3.K18@850.86,1491.83 v1(866.61,1507.58) U3.J18@850.86,1523.32 v1(866.61,1539.07) U3.H18@850.86,1554.82 ; U10.T1@857.39,313.13 873.14,297.37 v1(873.14,286.34) 873.14,245.18 C137.2@872.9,244.94 ; v1(866.61,1035.14) U3.AD19@882.36,1050.88 ; v1(873.14,612.33) U10.G1@857.39,596.59 ; U3.AA19@882.36,1145.37 v1(898.1,1129.62) ; U3.U19@882.36,1271.36 v1(898.1,1287.1) ; U3.T19@882.36,1302.85 v1(898.1,1318.6) ; U3.G19@882.36,1586.32 v1(898.11,1570.56) ; U10.E2@888.88,659.59 v1(873.14,675.32) ; v1(898.1,1192.62) U3.W19@882.36,1208.36 ; v1(898.1,1255.61) U3.V19@882.36,1239.86 v1(898.1,1224.11) U3.W19@882.36,1208.36 ; v1(904.64,769.81) U10.B3@920.38,754.07 ; U3.AD22@976.84,1050.88 v1(992.59,1035.14) ; U3.AA22@976.84,1145.37 v1(992.59,1129.62) ; U3.AB24@1039.84,1113.88 1039.91,1113.88 v1(1055.58,1098.2) ; U3.Y24@1039.84,1176.87 v1(1055.58,1161.12) ; v1(1062.12,549.34) U10.J8@1077.86,533.6 ; v1(1071.33,994.8) U3.AE25@1071.33,1019.39 ; U3.A25@1071.33,1775.29 v1(1087.08,1791.04) ; U10.G8@1077.86,596.59 v1(1093.62,612.33) ; U10.E8@1077.86,659.59 v1(1093.62,643.83) U10.F9@1109.35,628.09 ; U10.D8@1077.86,691.08 v1(1093.62,706.82) ; U10.T9@1109.35,313.13 v1(1125.11,297.37) 1125.66,296.83 v2(1181.38,296.83) 1209.38,296.83 C136.2@1210.38,297.83 ; U10.P9@1109.35,376.12 v1(1125.11,360.36) v2(1181.38,360.36) 1209.91,360.36 C138.2@1210.38,360.83 ; U10.M9@1109.35,439.11 v1(1125.11,423.36) v2(1181.38,423.36) ; U10.B9@1109.35,754.07 v1(1125.11,738.32) ; U10.A9@1109.35,785.57 v1(1125.11,801.31) ; v1(1125.11,580.84) U10.G9@1109.35,596.59 v1(1093.62,612.33) ; v1(1125.11,675.32) 1125.11,666.46 1125.36,666.2 1125.36,652.95 1125.11,652.7 v1(1125.11,643.83) U10.F9@1109.35,628.09 ; C152.2@1210.38,800.1 1210.38,825.34 v1(1211.38,826.34) ; v2(1250.33,396.39) 1251.38,397.43 R41.1@1251.38,424.58 ; v2(1266.36,1406.44) 1239.45,1406.44 C96.2@1226.23,1419.66 1239.41,1432.84 v2(1266.36,1432.84) ; v2(1280,524.49) 1290,534.49 C145.2@1290,563.82 ; v1(1400.69,1905.51) U2.A6@1429.13,1905.51 ; v2(1453.54,822.09) U1.15@1485.72,822.09 ; U2.C4@1468.5,1866.14 v1(1488.19,1885.82) ; U2.E7@1507.87,1925.2 1523.62,1925.2 v1(1527.56,1929.13) ; U1.14@1509.42,845.79 1509.42,818.63 v2(1515.52,812.52) ; v2(1531,600) 1568.47,562.53 U1.32@1568.47,542.49 U1.32@1567.96,543 ; U2.G5@1547.24,1885.83 1547.24,1890.52 v1(1565.63,1908.9) 1586.61,1887.91 U2.J5@1586.61,1885.83 ; U2.H10@1566.93,1984.25 v1(1566.93,2003.94) ; v1(1582.68,1933.07) 1594.49,1944.88 U2.K8@1606.3,1944.88 ; U2.N5@1665.35,1885.83 U2.P6@1685.04,1905.51 1688.98,1905.51 1707.59,1924.13 v1(1716.54,1924.13) ; v2(1673.61,812.52) 1686.58,825.49 U1.5@1686.58,845.79 ; U2.P4@1685.04,1866.14 v1(1704.72,1866.14) ; v2(1742,690.84) 1742,680.1 1757.49,664.61 U1.48@1789.02,664.61 ; R4.1@1765.32,927.99 v2(1787.2,927.99) ; R112.2@1780.63,1308.82 v2(1803.74,1308.82) ; R114.2@1780.63,1352.13 v2(1803.74,1352.13) ; R113.2@1780.63,1395.43 v2(1803.74,1395.43) ; R104.2@1780.63,1438.74 v2(1803.74,1438.74) ; R108.2@1780.63,1482.05 v2(1803.74,1482.05) ; R103.2@1780.63,1525.35 v2(1803.74,1525.35) ; R109.2@1780.63,1568.66 v2(1803.74,1568.66) ; R118.2@1780.63,1611.97 v2(1803.74,1611.97) ; v2(1913.35,735.65) C2.2@1913.35,772.88 ; v1(520.15,1224.11) U3.W7@504.4,1208.36 v1(520.15,1192.62) U3.W8@535.9,1208.36 v1(520.15,1224.11) ; v1(526.62,612.58) U8.G9@542.43,596.77 ; v1(526.62,612.58) 542.12,628.08 U8.F9@542.42,628.09 557.93,612.58 v1(558.12,612.58) 542.43,596.89 U8.G9@542.43,596.77 ; U3.U11@630.39,1271.36 v1(646.14,1287.1) ; U3.U11@630.39,1271.36 v1(614.64,1287.1) v1(646.14,1318.6) ; U3.U11@630.39,1271.36 v1(646.14,1255.61) U3.U12@661.88,1271.36 v1(646.14,1287.1) ; v1(646.14,1287.1) U3.T12@661.88,1302.85 v1(646.14,1318.6) ; v1(873.14,675.32) U10.E1@857.39,659.59 v1(841.65,675.32) U10.D1@857.39,691.08 v1(873.14,675.32) ; v1(1093.62,612.33) U10.F9@1109.35,628.09
  Top Layer w12: D1.2@1750.99,131 1778,131 v2(1802,155)
  Top Layer w15: R32.2@205.48,1790 v2(205.48,1821.83) ; U13.3@350.09,2019.96 379.96,2019.96 v2(380,2020) ; C77.2@1252.43,1291.05 v2(1283.93,1291.05)
  Top Layer w18: v1(274.72,297.37) 284.8,287.29 C183.2@284.8,223.05
  Top Layer w20: C191.2@198.18,1034.93 v1(198.18,1062.39) ; v2(1531,600) U1.57@1625.14,694.14 ; v2(1537.37,694.14) U1.57@1625.14,694.14 ; v2(1585,641.77) v2(1637.37,694.14) ; v2(1637.37,594.14) v2(1637.37,694.14) ; v2(1737.37,594.14) v2(1637.37,694.14) ; U1.57@1625.14,694.14 v2(1637.37,694.14)
  Bottom Layer w5: U7.G9@290.47,596.59 U7.G8@321.96,596.59
  Bottom Layer w8.5: v1(153.38,459.34) 154.88,459.34 162.12,452.1 C128.2@189.45,452.1 205.33,452.1 209.58,447.85 234.3,447.85 v1(245.33,458.89) ; R36.1@160.62,485.34 160.62,514.17 v1(165.33,518.89) ; C158.2@189.38,297.08 197.58,297.37 v1(274.72,297.37) ; C157.2@189.38,360.58 193.59,360.36 v1(274.72,360.36) ; C156.2@189.45,660.58 258.14,660.58 v1(274.64,644.08) ; C154.2@190.9,751.67 261.54,751.67 v1(274.64,738.57) 274.98,738.57 U7.B9@290.47,754.07 ; C155.2@193.97,596.58 v1(257.28,596.58) ; R38.2@272.99,1006.47 296.85,1006.47 v1(299.68,1003.64) ; v1(274.64,801.56) 276.69,803.61 C181.2@276.62,855.27 ; C130.2@341.69,1112.59 356.15,1098.13 v1(362.67,1098.13) ; v1(551.65,1192.62) 556.89,1197.86 C189.2@567.28,1197.86 577.9,1197.86 v1(583.14,1192.62) 588.38,1197.86 C177.2@598.77,1197.86 609.4,1197.86 v1(614.64,1192.62) 616.49,1190.78 C173.2@629.87,1190.78 ; v1(614.64,1255.61) 615.07,1256.04 C186.2@630.27,1256.04 645.71,1256.04 v1(646.14,1255.61) ; C173.2@631.72,1192.62 C173.2@629.87,1190.78 ; v1(677.63,1192.62) 672.39,1197.86 C185.2@661.76,1197.86 651.38,1197.86 v1(646.14,1192.62) 644.29,1190.78 C173.2@629.87,1190.78 ; v1(841.65,801.31) 841.65,851.37 C160.2@843.62,855.34 ; v1(898.1,1224.11) 893.41,1228.8 C172.2@893.41,1240.14 893.41,1250.93 v1(898.1,1255.61) 893.41,1260.3 C188.2@893.41,1271.64 893.41,1282.42 v1(898.1,1287.1) 893.41,1291.79 C187.2@893.41,1303.14 893.41,1313.92 v1(898.1,1318.6) ; v1(1125.11,580.84) 1142.38,580.84 1149.9,588.35 1176.08,588.35 1180.33,592.6 C127.2@1210.38,592.6 ; v1(1125.11,643.83) 1150.87,643.83 1163.64,656.6 C162.2@1210.38,656.6 ; v1(1125.11,738.32) 1206.17,738.32 C161.2@1210.38,737.1 ; v1(1125.11,801.31) 1206.18,801.31 C142.2@1210.38,800.1 ; v2(1181.38,360.36) 1206.92,360.36 C164.2@1210.38,360.83 ; C163.2@1211.38,497.58 v1(1241.64,497.58)
  Bottom Layer w9: v1(266.38,510.34) 274.13,518.09 301.13,518.09 316.63,533.59 U7.J8@321.96,533.6 ; v1(838.65,520.84) 841.4,518.09 867.78,518.09 883.28,533.59 U9.J8@888.89,533.6 ; v1(841.65,675.32) v1(873.14,675.32)
  Bottom Layer w10: v2(140.3,1480.34) C112.1@165.9,1480.34 ; v2(142.28,1527.58) R31.2@165.9,1527.58 ; v2(142.28,1622.07) R19.2@165.9,1622.07 ; v1(257.28,596.58) 265.52,588.34 284.38,588.34 290.47,594.43 U7.G9@290.47,596.59 ; v1(274.72,297.37) U7.T9@290.47,313.13 ; v1(274.72,360.36) U7.P9@290.47,376.12 ; v1(274.72,423.36) U7.M9@290.47,439.11 ; U7.F9@290.39,628.33 U7.F9@290.47,628.09 ; v1(425.66,1602.07) 445.26,1621.67 C125.2@449.6,1621.67 ; C116.2@442.52,1432.7 437.54,1432.7 v1(425.66,1444.58) 437.79,1456.71 C113.2@464.96,1456.71 ; v1(457.16,1665.06) 469.67,1677.58 C100.2@479.13,1677.58 479.13,1663.87 492,1651 C124.2@499,1651 ; C101.2@497,1821.52 523.1,1847.62 v2(523.1,1854.6) ; C123.2@499.12,1203.96 508.81,1203.96 v1(520.15,1192.62) ; C104.2@507.78,1365.77 507.78,1362.47 v1(520.15,1350.1) 525.19,1345.06 C44.2@525.19,1334.27 525.19,1323.65 v1(520.15,1318.6) 525.59,1313.17 C57.2@525.59,1302.78 525.59,1292.54 v1(520.15,1287.1) 525.59,1281.67 C58.2@525.59,1271.28 525.59,1261.05 v1(520.15,1255.61) ; C87.2@507.78,1428.76 507.78,1425.46 v1(520.15,1413.09) 530.7,1423.65 C43.2@530.7,1428.76 ; v1(520.15,1444.58) 530.23,1454.66 C86.2@530.23,1473.64 ; v1(520.16,1507.57) 530.62,1518.03 C105.2@530.62,1527.19 ; C117.2@521.22,1882.4 521.22,1889.62 v2(540.5,1908.9) ; v1(526.62,612.58) U7.G1@542.43,596.77 ; C106.2@530.62,1551.6 530.62,1577.97 C122.2@530.23,1578.37 543.85,1578.37 v1(551.65,1570.57) ; C120.2@533.12,2103.6 533.12,2095.08 v2(546.4,2081.8) 565.38,2100.78 C119.2@565.38,2103.6 ; U7.T1@542.43,313.13 v1(558.18,297.37) 558.62,296.94 C129.2@558.62,244.94 ; U7.P1@542.43,376.12 v1(561.19,357.35) C179.2@638.45,357.35 ; U7.M1@542.43,439.11 v1(558.18,423.36) ; U7.E1@542.43,659.59 542.43,659.89 v1(558.12,675.58) 542.63,691.07 U7.D1@542.43,691.08 ; U7.B1@542.43,754.07 557.93,738.56 v1(558.12,738.56) ; v1(551.65,1507.58) 557.24,1513.17 C84.2@557.24,1526.25 ; v1(558.12,581.09) 542.63,596.58 U7.G1@542.43,596.59 U7.G1@542.43,596.77 ; v1(558.12,612.58) 542.43,596.89 U7.G1@542.43,596.77 ; v1(558.12,801.56) 558.12,852.72 C178.2@559.14,853.74 ; v1(583.14,1350.1) 590.46,1357.42 C49.2@590.46,1381.12 590.46,1405.78 v1(583.14,1413.09) 587.79,1417.75 C53.2@587.79,1428.76 587.79,1439.93 v1(583.14,1444.58) 588.18,1449.63 C40.2@588.18,1460.26 588.18,1471.04 v1(583.14,1476.08) 588.18,1481.13 C52.2@588.18,1491.75 588.18,1502.54 v1(583.14,1507.58) ; v1(583.13,1570.57) 590.07,1577.51 C91.2@590.07,1590.18 590.07,1613.8 C115.2@590.46,1614.19 C94.1@614.32,1614.19 ; C63.2@609.36,1302.78 609.36,1292.38 v1(614.64,1287.1) 609.36,1281.82 C61.2@609.36,1271.28 609.36,1261.76 v1@615.07,1256.04 ; v1@615.88,537.24 615.88,515.7 623.1,508.48 R37.2@641.1,508.48 ; C90.2@635.74,1590.18 658.18,1590.18 C88.2@659.2,1591.21 677.63,1572.78 v1(677.63,1570.57) ; v1@645.71,1256.04 651.18,1261.51 C62.2@651.18,1271.28 651.18,1282.07 v1(646.14,1287.1) 650,1290.96 C60.2@650,1303.17 650,1314.75 v1(646.14,1318.6) ; v1(646.14,1476.08) v1@648.81,1478.76 ; v1(646.14,1507.58) v1@648.81,1510.26 ; v1(646.14,1539.07) 648.81,1536.4 C39.2@648.81,1523.25 v1@648.81,1510.26 ; C41.2@649.21,1460.26 649.21,1478.37 v1@648.81,1478.76 ; v1(677.63,1192.62) 677.94,1192.94 C190.2@710.78,1192.94 ; C42.2@683.27,1381.12 v2@709.85,1381.12 ; C110.2@697,1641.12 C109.2@719.83,1641.12 733.07,1641.12 v1(740.63,1633.56) ; C54.2@707.24,1432.7 707.24,1383.74 v2(709.38,1381.59) v2@709.85,1381.12 ; C66.2@711.17,1333.88 v2@711.17,1379.8 ; C92.2@756.45,1577.03 765.66,1577.03 v1(772.12,1570.57) ; v1(772.12,1192.62) 775.78,1196.29 C176.2@787.75,1196.29 799.95,1196.29 v1(803.62,1192.62) 806.89,1195.89 C175.2@819.24,1195.89 C174.2@851.13,1195.89 863.34,1195.89 v1(866.61,1192.62) ; v1(772.12,1255.61) 769.99,1257.74 C65.2@769.99,1271.28 769.99,1284.97 v1(772.12,1287.1) 769.99,1289.23 C64.2@769.99,1302.78 769.99,1316.47 v1(772.12,1318.6) 767.63,1323.1 C56.2@767.63,1334.27 767.63,1345.61 v1(772.12,1350.1) 759.6,1362.62 C75.2@759.6,1381.52 ; C71.2@788.18,1554.75 787.79,1554.75 v1(772.12,1539.07) ; C98.2@819.44,1577.03 C99.2@787.95,1577.03 778.58,1577.03 v1(772.12,1570.57) ; v1(835.11,1255.61) 830.22,1260.5 C67.2@830.22,1270.89 830.22,1282.22 v1(835.11,1287.1) 830.22,1291.99 C73.2@830.22,1302.78 830.22,1313.72 v1(835.11,1318.6) 830.62,1323.09 C74.2@830.62,1334.27 830.62,1345.61 v1(835.11,1350.1) ; U9.T9@857.4,313.13 873.14,297.37 v1(873.14,286.34) 873.14,245.18 C126.2@872.9,244.94 ; C78.2@862.11,1554.75 862.11,1543.57 v1(866.61,1539.07) 861.72,1534.19 C80.2@861.72,1523.25 861.72,1512.47 v1(866.61,1507.58) 853.06,1494.04 C81.2@853.06,1491.75 853.06,1489.63 v1(866.61,1476.08) ; C107.2@862.11,1582.7 882.19,1582.7 C102.2@887.16,1587.66 898.11,1576.71 v1(898.11,1570.56) ; C93.2@875.19,1491.75 875.19,1484.67 v1(866.61,1476.08) ; U9.E8@888.89,659.59 v1(873.14,675.32) U9.D8@888.89,691.08 ; C83.2@902.51,1381.52 870.93,1413.09 v1(866.61,1413.09) ; v1(1093.62,612.33) U9.G1@1109.36,596.59 v1(1125.11,580.84) ; v1(1093.62,706.82) U9.D1@1109.36,691.08 v1(1125.11,675.32) U9.E1@1109.36,659.59 ; v2(1181.38,296.83) 1209.38,296.83 C180.2@1210.38,297.83 ; C159.2@1207.17,1019.39 C143.2@1207.17,1066.64 ; v2(1283.93,1291.05) v2@1283.93,1293.07 ; C36.2@1415.88,542.17 C36.2@1421.22,542.17 v2(1464.07,542.17) ; C198.2@1452.76,1844.48 C198.2@1452.76,1844.48 C196.2@1452.72,1883.87 1454.68,1885.82 v1(1488.19,1885.82) ; R98.2@1453.52,1352.16 R100.2@1453.52,1308.85 v2(1476.87,1308.85) ; R93.2@1453.52,1438.77 R83.2@1453.52,1395.46 v2(1476.87,1395.46) ; R80.2@1453.52,1482.08 R85.2@1453.52,1525.39 ; R70.2@1453.52,1568.69 R74.2@1453.52,1612 ; R80.2@1453.52,1482.08 v2(1476.87,1482.08) ; R70.2@1453.52,1568.69 v2(1476.87,1568.69) ; C32.2@1515.16,716.35 C32.2@1515.16,723.67 ; C30.2@1554.69,818.95 1667.18,818.95 v2(1673.61,812.52) ; R87.2@1644.51,1352.14 R91.2@1644.51,1308.83 v2(1667.87,1308.83) ; R96.2@1644.51,1438.76 R89.2@1644.51,1395.45 v2(1667.87,1395.45) ; R78.2@1644.51,1525.37 R68.2@1644.51,1482.06 v2(1667.87,1482.06) ; R72.2@1644.52,1611.98 R76.2@1644.51,1568.68 v2(1667.87,1568.68) ; v2@1736.9,589.09 1736.9,593.67 v2(1737.37,594.14) ; C1.2@1739,727 v2(1739,762) ; C5.2@1742,659 v2(1742,690.84) ; R116.2@1780.63,1308.82 v2(1803.74,1308.82) ; R110.2@1780.63,1352.13 v2(1803.74,1352.13) ; R115.2@1780.63,1395.43 v2(1803.74,1395.43) ; R107.2@1780.63,1438.74 v2(1803.74,1438.74) ; R102.2@1780.63,1482.05 v2(1803.74,1482.05) ; R105.2@1780.63,1525.35 v2(1803.74,1525.35) ; R111.2@1780.63,1568.66 v2(1803.74,1568.66) ; R117.2@1780.63,1611.97 v2(1803.74,1611.97) ; C11.2@1799.57,567.36 1800.74,566.19 v2(1833.86,566.19) 1841,573.33 R6.1@1841,590 ; v1(646.14,1318.6) 654.22,1326.68 C50.2@654.22,1333.85 654.22,1342.02 v1(646.14,1350.1) 629.03,1333 C51.2@628.4,1333 642.79,1318.6 v1(646.14,1318.6) ; v1@648.81,1478.76 C38.2@648.81,1491.75 v1@648.81,1510.26 ; v2@709.85,1381.12 v2@711.17,1379.8 ; v2@711.17,1379.8 712.89,1381.52 C75.2@759.6,1381.52 ; C75.2@759.6,1381.52 759.6,1400.58 v1(772.12,1413.09) ; v1(772.12,1413.09) 764.32,1420.89 C45.2@764.32,1428.76 764.32,1436.79 v1(772.12,1444.58) ; v1(772.12,1413.09) 772.52,1413.09 C68.2@788.18,1428.76 787.94,1428.76 v1(772.12,1444.58) ; v1(772.12,1444.58) 764.32,1452.38 C47.2@764.32,1460.26 764.32,1468.29 v1(772.12,1476.08) ; v1(772.12,1444.58) 772.51,1444.58 C72.2@788.18,1460.26 787.94,1460.26 v1(772.12,1476.08) ; v1(772.12,1476.08) 764.32,1483.88 C48.2@764.32,1491.75 764.32,1499.79 v1(772.12,1507.58) 764.32,1515.38 C46.2@764.32,1523.25 764.32,1531.28 v1(772.12,1539.07) ; v1(772.12,1476.08) 772.52,1476.08 C69.2@788.18,1491.75 772.35,1507.58 772.52,1507.58 C70.2@788.18,1523.25 772.36,1539.07 v1(772.12,1539.07) ; v1(772.12,1539.07) 764.32,1546.87 C55.2@764.32,1554.75 764.32,1562.78 v1(772.12,1570.57) ; v1(866.61,1413.09) 874.8,1421.28 C95.2@874.8,1428.37 874.8,1436.39 v1(866.61,1444.58) ; v1(866.61,1413.09) 853.06,1426.64 C79.2@853.06,1428.76 853.06,1431.04 v1(866.61,1444.58) ; v1(866.61,1444.58) 853.06,1458.13 C82.2@853.06,1460.26 853.06,1462.54 v1(866.61,1476.08) ; v1(866.61,1444.58) 875.19,1453.17 C103.2@875.19,1460.26 875.19,1467.5 v1(866.61,1476.08)
  Bottom Layer w12: v1(274.64,644.08) 290.39,628.33 v1(306.14,644.08) 321.63,659.58 U7.E8@321.96,659.59 ; v1(274.64,801.56) 290.47,785.73 U7.A9@290.47,785.57 ; v1(306.14,707.07) 321.96,691.24 U7.D8@321.96,691.08 ; U7.B3@479.44,754.07 479.44,754.15 v1(495.33,770.04) ; v1(500.19,522.84) U7.J2@510.94,533.6 ; U7.E2@510.94,659.59 510.94,659.89 v1(526.62,675.58) ; v1(841.65,580.84) U9.G9@857.4,596.59 ; v1(841.65,738.32) U9.B9@857.4,754.07 ; v1(841.65,801.31) U9.A9@857.4,785.57 ; v1(843.65,426.31) U9.M9@857.4,439.11 ; v1(844.38,362.34) 844.38,363.1 U9.P9@857.4,376.12 ; U9.G8@888.89,596.59 v1(873.14,612.33) ; U9.B3@1046.37,754.07 v1(1062.12,769.81) ; v1(1062.12,549.34) U9.J2@1077.87,533.6 ; U9.E2@1077.87,659.59 v1(1093.62,643.83) U9.E1@1109.36,659.59 v1(1125.11,643.83) ; U9.T1@1109.36,313.13 v1(1125.11,297.37) ; U9.P1@1109.36,376.12 v1(1125.11,360.36) ; U9.M1@1109.36,439.11 v1(1125.11,423.36) ; U9.B1@1109.36,754.07 v1(1125.11,738.32) ; U9.G9@857.4,596.59 v1(873.14,612.33) ; U9.G9@857.4,596.59 v1(841.65,612.33) U9.F9@857.4,628.09 v1(873.14,612.33)
  Bottom Layer w15: R64.1@228.86,1930.11 R67.1@272.17,1930.11 v2(272.17,1954.95) ; v2(280.07,1539.39) 297.39,1556.71 C89.2@297.39,1582.7 ; R65.1@315.48,1930.11 R66.1@358.78,1930.11 v2(358.78,1954.95) ; v1(677.63,1570.57) 704.17,1570.57 C59.2@707.24,1573.64 ; R24.2@709.08,1761.52 v1@709.08,1790.99 ; C76.2@1252.43,1291.05 v2(1283.93,1291.05)
  Bottom Layer w20: C140.2@183.03,986.6 C141.2@183.03,1029.91 183.03,1047.24 v1(198.18,1062.39) ; C34.2@1407.84,305.56 C33.2@1486.58,305.56 ; C31.2@1490.12,996.9 C25.2@1567.68,996.9 ; C14.2@1648,1105.16 C17.2@1726.34,1105.16 C16.2@1804.69,1105.16 ; C4.2@1706.27,593.67 v2@1736.9,593.67
  Bottom Layer w25: v3(1978.94,597.05) J2.51@2040.35,597.05 J2.52@2187.99,597.05 v3(2244.49,597.05) ; v3(1978.94,647.05) J2.49@2040.35,647.05 J2.50@2187.99,647.05 v3(2246.65,647.05) ; J2.5@2040.35,1747.05 v3(2098.89,1747.05) v3(2126.45,1747.05) J2.6@2187.99,1747.05 v3(2248.5,1747.05)
  other v1: 771.38,219.34 771.38,310.34 623.38,380.84 616.88,537.24 1000.24,571.37 154,688.34 1212.6,1110.24 1854.33,1925.2 1488.19,1997.11
  other v2: 1839,336.34 1755.08,337 1593.06,338 1676,338 1501,339 1431,340 1362,341.09 1687.37,639.38 1687.37,742 1585,743.35 1637.37,771.58 1226.33,945.34 1723.16,1058.06 1817.68,1058.06 1637.37,1059.38 1562.13,1059.93 1493.68,1061.79 1421.22,1062.64 1350.52,1062.99 111.02,1255.61 748.5,1877.66 602.83,1885.54 2110.24,1917.32 744.56,1980.02 854.14,2014.2 854.8,2039.08 422.76,2078.74 452.76,2078.74
  other v3: 2098.89,598.13 2134.33,598.13 2098.89,647.05 2134.33,647.05